# EAGLE board Interconnect_board_limit_switches_v1p6 (EAGLE 9.5.2)
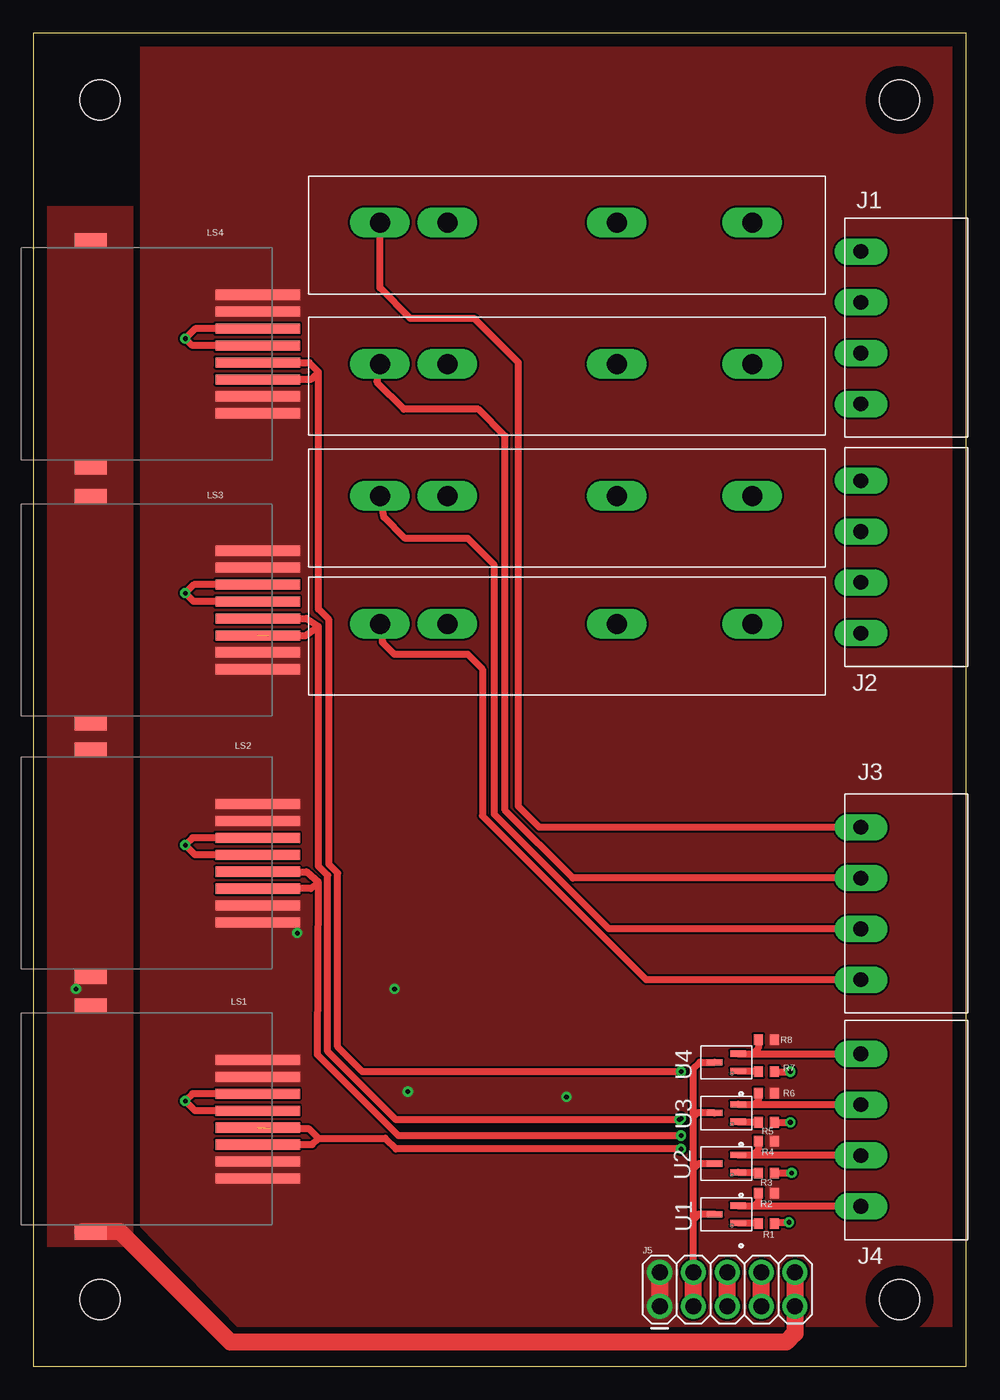
[diagram p0: board, top side]
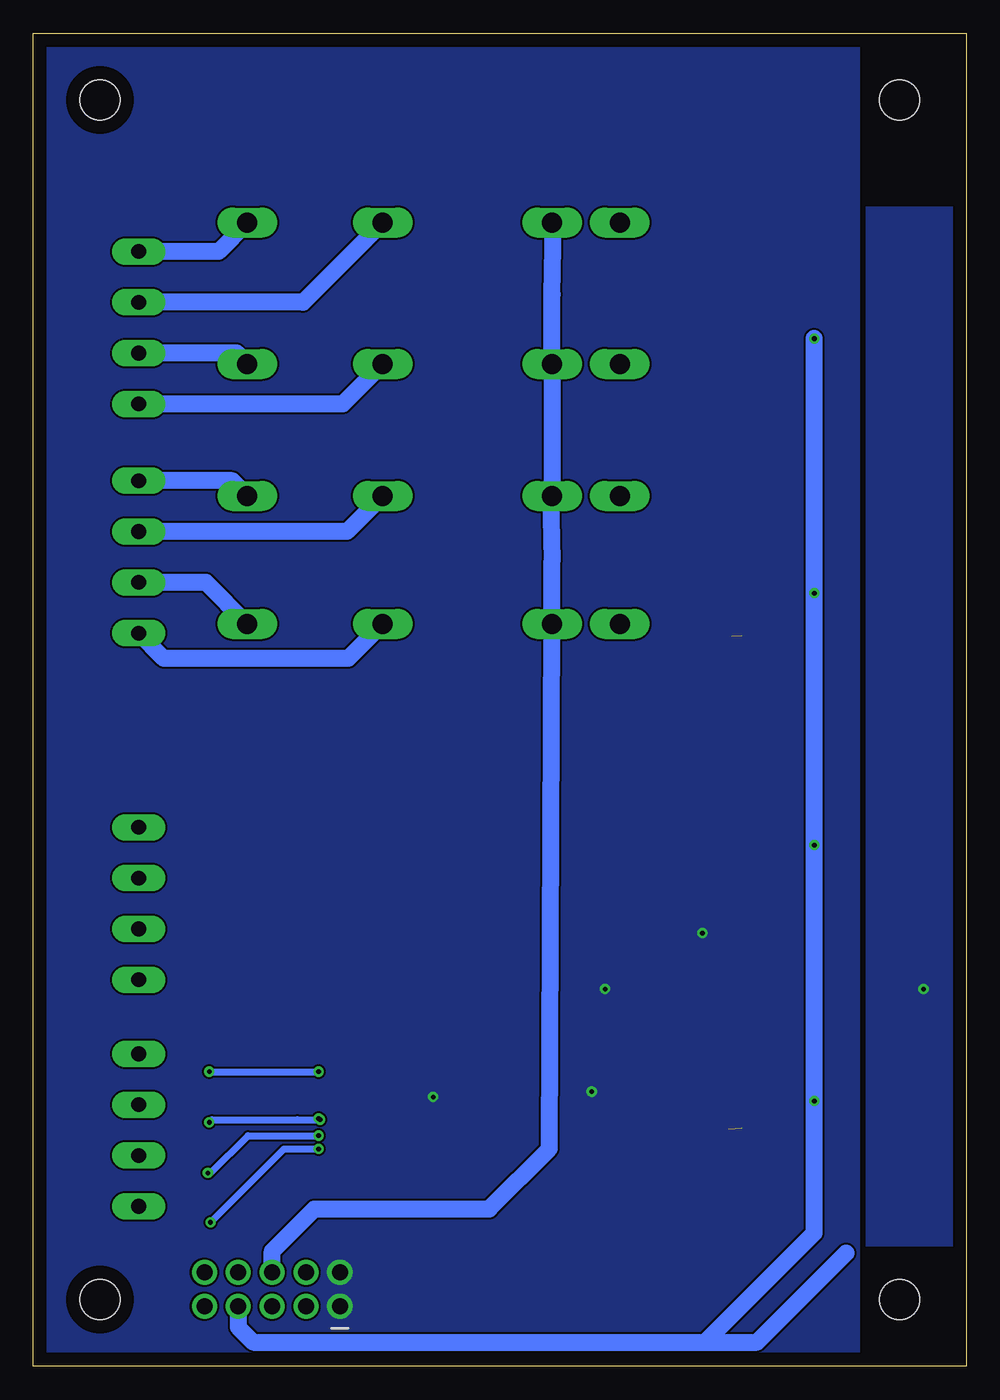
[diagram p1: board, bottom side, seen from below]

Size 70 x 100 mm. Coordinates in mm from the lower left corner, seen from the top.
Outline: 0,0 70,0 70,100 0,100 0,0
Copper layers (1*16): Top 0.035mm / dielectric 1.5mm / Bottom 0.035mm
Design rules "default": minimum track width 6mil, minimum drill 0.35mm, track to track 6mil, track to pad 6mil, pad to pad 6mil, via to via 6mil, smd to smd 6mil, copper to edge 40mil, drill to drill 6mil, minimum pad ring 10mil, minimum via ring 8mil, stop-mask expansion 4mil, vias tented up to drill 0mil, thermal gap 10mil
Holes 3 mm at 5,95 5,5 65,5 65,95

## Footprints (pad centres in the part's own frame; a part is rotated, then mirrored left to right if it is on the bottom)
1X4_3.81MM_PITCH = drill 1.1 pad 2 long: P$1 0,0; P$2 3.81,0; P$3 7.62,0; P$4 11.43,0
2X5 = drill 1.2 pad 1.88: 1 0,0; 2 0,2.54; 3 2.54,0; 4 2.54,2.54; 5 5.08,0; 6 5.08,2.54; 7 7.62,0; 8 7.62,2.54; 9 10.16,0; 10 10.16,2.54
RJ45_SMT = smd 0.76 x 6.35: P$1 -3.18,8.94; P$2 -1.91,8.94; P$3 -0.64,8.94; P$4 0.63,8.94; P$5 1.9,8.94; P$6 3.17,8.94; P$7 4.44,8.94; P$8 5.71,8.94 | smd 1.1 x 2.4: P$9 -7.25,-3.6; P$10 9.75,-3.6
0402 = smd 0.8 x 0.7: P$1 0,0.6; P$2 0,-0.6
RELAY_KYOTO_KF0604D = drill 1.5 long: P$1 0,0; P$2 -5.08,0; P$3 -17.78,0; P$4 -27.94,0
SOT323 = smd 0.457 x 1.168: 1 -0.65,-0.876; 2 0.65,-0.876; 3 0,0.876

## Placement (x,y rotation side)
J1  [1X4_3.81MM_PITCH]  62.1,72.2 90 top
J2  [1X4_3.81MM_PITCH]  62.1,55 90 top
J3  [1X4_3.81MM_PITCH]  62.1,29 90 top
J4  [1X4_3.81MM_PITCH]  62.1,12 90 top
J5  [2X5]  47,4.5 0 top
LS1  RJ45_SMTRJ  [RJ45_SMT]  7.9,19.8 270 top
LS2  RJ45_SMTRJ  [RJ45_SMT]  7.9,39 270 top
LS3  RJ45_SMTRJ  [RJ45_SMT]  7.9,58 270 top
LS4  RJ45_SMTRJ  [RJ45_SMT]  7.9,77.2 270 top
R1  200K  [0402]  55,10.7 270 top
R2  1K  [0402]  55,13 270 top
R3  200K  [0402]  55,14.5 270 top
R4  1K  [0402]  55,16.9 270 top
R5  200K  [0402]  55,18.3 270 top
R6  1k  [0402]  55,20.5 270 top
R7  200K  [0402]  55,22.1 270 top
R8  1k  [0402]  55,24.5 270 top
RELAY_1  RELAY_KYOTO_KF0604D  [RELAY_KYOTO_KF0604D]  26,55.7 180 top
RELAY_2  RELAY_KYOTO_KF0604D  [RELAY_KYOTO_KF0604D]  26,65.3 180 top
RELAY_4  RELAY_KYOTO_KF0604D  [RELAY_KYOTO_KF0604D]  26,85.8 180 top
RELAY_5  RELAY_KYOTO_KF0604D  [RELAY_KYOTO_KF0604D]  26,75.2 180 top
U1  [SOT323]  52,11.4 90 top
U2  [SOT323]  52,15.2 90 top
U3  [SOT323]  52,19 90 top
U4  [SOT323]  52,22.8 90 top

## Library data of the parts
J1-J4 LS1-LS4 R1-R8 RELAY_1 RELAY_2 RELAY_4 RELAY_5 = 3D_MIG_Controller
J5 = 3D_MIG_Controller; PROD_ID: CONN-08499; SF_ID: PRT-0778
U1-U4 = 3D_MIG_Controller; MANUFACTURER_PART_NUMBER: BC846BW; VENDOR: Nexperia

## Nets
1_LS: J4.P$1 R2.P$2 U1.2
2_LS: J4.P$2 R4.P$2 U2.2
3_LS: J4.P$3 R6.P$2 U3.2
4_LS: J4.P$4 R8.P$2 U4.2
GND: J5.1 J5.2 LS1.P$1 LS1.P$2 LS1.P$7 LS1.P$8 LS2.P$1 LS2.P$2 LS2.P$7 LS2.P$8 LS3.P$1 LS3.P$2 LS3.P$7 LS3.P$8 LS4.P$1 LS4.P$2 LS4.P$7 LS4.P$8 R2.P$1 R4.P$1 R6.P$1 R8.P$1
GNDE: J5.9 J5.10 LS1.P$9 LS1.P$10 LS2.P$9 LS2.P$10 LS3.P$9 LS3.P$10 LS4.P$9 LS4.P$10
N$1: R1.P$2 U1.1
N$2: R7.P$2 U4.1
N$5: R3.P$2 U2.1
N$11: R5.P$2 U3.1
R1: LS1.P$5 LS1.P$6 R1.P$1
R2: LS2.P$5 LS2.P$6 R3.P$1
R3: LS3.P$5 LS3.P$6 R5.P$1
R4: LS4.P$5 LS4.P$6 R7.P$1
RELAY_OUT_1: J3.P$1 RELAY_1.P$1
RELAY_OUT_2: J3.P$2 RELAY_2.P$1
RELAY_OUT_3: J3.P$3 RELAY_5.P$1
RELAY_OUT_4: J3.P$4 RELAY_4.P$1
RELAY_OUT_NEG_1: J2.P$2 RELAY_1.P$4
RELAY_OUT_NEG_2: J2.P$4 RELAY_2.P$4
RELAY_OUT_NEG_3: J1.P$2 RELAY_5.P$4
RELAY_OUT_NEG_4: J1.P$4 RELAY_4.P$4
RELAY_OUT_POS_1: J2.P$1 RELAY_1.P$3
RELAY_OUT_POS_2: J2.P$3 RELAY_2.P$3
RELAY_OUT_POS_3: J1.P$1 RELAY_5.P$3
RELAY_OUT_POS_4: J1.P$3 RELAY_4.P$3
VDD: J5.3 J5.4 U1.3 U2.3 U3.3 U4.3
VDD5: J5.5 J5.6 RELAY_1.P$2 RELAY_2.P$2 RELAY_4.P$2 RELAY_5.P$2
VDD12: J5.7 J5.8 LS1.P$3 LS1.P$4 LS2.P$3 LS2.P$4 LS3.P$3 LS3.P$4 LS4.P$3 LS4.P$4

## Tracks (layer width: path | path; a pad name or v marks a point on that pad's centre or on a via)
1_LS
  Top 0.508: U1.2 54.1,12.05 | 54.1,12.05 62.05,12.05 J4.P$1 | R2.P$2 54.4,12.35 54.1,12.05
2_LS
  Top 0.508: U2.2 54,15.85 | 54,15.85 62.06,15.85 J4.P$2 | R4.P$2 54.4,16.25 54,15.85
3_LS
  Top 0.508: U3.2 54.1,19.65 | 54.1,19.65 62.07,19.65 J4.P$3 | R6.P$2 54.4,19.95 54.1,19.65
4_LS
  Top 0.508: U4.2 54,23.45 | 54,23.45 62.08,23.45 J4.P$4 | R8.P$2 54.4,23.85 54,23.45
GND  (via drill 0.35)
  Top 1.27: J5.1 J5.2
  other vias: 19.8,32.5 27.1,28.3 28.1,20.6 40,20.2
  pour Top (no thermals): 8,100 8,10.5 15.3,3 47.6,3 70,3 70,100
  pour Bottom (no thermals): 8,100 70,100 70,-0.4 8,-0.4
GNDE  (via drill 0.35)
  Top 1.27: J5.10 J5.9 57.16,2.46 56.5,1.8 14.8,1.8 6.5,10.1 3.7,10.1
  other vias: 3.2,28.3
  pour Top (no thermals): 7.5,87 0,87 0,9 7.5,9
  pour Bottom (no thermals): 7.5,87 0,87 0,9 7.5,9
N$1
  Top 0.508: U1.1 54.35,10.75 R1.P$2
N$2
  Top 0.508: U4.1 54.35,22.15 R7.P$2
N$5
  Top 0.508: U2.1 54.35,14.55 R3.P$2
N$11
  Top 0.508: U3.1 54.35,18.35 R5.P$2
R1  (via drill 0.35)  (1 unrouted)
  Top 0.508: R1.P$1 55.7,10.8 v56.7,10.8 | 21.4,17.1 20.7,17.8 17.8,17.8 | LS1.P$6 20.93,16.63 21.4,17.1 | v48.6,16.3 27.2,16.3 26.4,17.1 21.4,17.1
  Bottom 0.508: v56.7,10.8 51.2,16.3 v48.6,16.3
R2  (via drill 0.35)
  Top 0.508: R3.P$1 v56.9,14.5 | v48.6,17.3 27.4,17.3 21.32,23.38 21.4,36.3 | 21.4,36.3 20.83,35.83 LS2.P$6 | LS2.P$5 20.5,37.1 21.4,36.3
  Bottom 0.508: v56.9,14.5 56.7,14.5 53.9,17.3 v48.6,17.3
R3  (via drill 0.35)  (1 unrouted)
  Top 0.508: R5.P$1 v56.8,18.3 | v48.48,18.5 27.2,18.5 22.09,23.61 22.09,36.83 21.4,37.51 21.4,55.5 | 21.4,55.5 20.4,54.8 17.6,54.8 | LS3.P$5 20.5,56.1 21.4,55.5
  Bottom 0.508: v56.8,18.3 56.6,18.5 50.2,18.5 v48.48,18.5 v48.6,18.59
R4  (via drill 0.35)
  Top 0.508: R7.P$1 v56.8,22.1 | v48.6,22.1 24.7,22.1 22.84,23.95 22.84,37 22.18,37.66 22.18,56.02 21.4,56.8 21.4,74.6 | 21.4,74.6 20.83,74.03 LS4.P$6 | LS4.P$5 20.7,75.3 21.4,74.6
  Bottom 0.508: v56.8,22.1 v48.6,22.1
RELAY_OUT_1
  Top 0.508: J3.P$1 46,29 33.7,41.3 33.7,52.3 32.6,53.4 27.1,53.4 26.2,54.3 RELAY_1.P$1
RELAY_OUT_2
  Top 0.508: J3.P$2 43.19,32.81 34.6,41.4 34.6,60.1 32.6,62.1 27.9,62.1 26.3,63.7 RELAY_2.P$1
RELAY_OUT_3
  Top 0.508: J3.P$3 40.48,36.62 35.4,41.7 35.4,69.8 33.4,71.8 27.8,71.8 25.8,73.8 RELAY_5.P$1
RELAY_OUT_4
  Top 0.508: J3.P$4 37.97,40.43 36.4,42 36.4,75.3 33.1,78.6 28.3,78.6 26,80.9 RELAY_4.P$1
RELAY_OUT_NEG_1
  Bottom 1.27: RELAY_1.P$4 57.05,58.81 J2.P$2
RELAY_OUT_NEG_2
  Bottom 1.27: RELAY_2.P$4 55.07,66.43 J2.P$4
RELAY_OUT_NEG_3
  Bottom 1.27: RELAY_5.P$4 54.75,76.01 J1.P$2
RELAY_OUT_NEG_4
  Bottom 1.27: RELAY_4.P$4 56.11,83.63 J1.P$4
RELAY_OUT_POS_1
  Bottom 1.27: RELAY_1.P$3 46.38,53.1 60.2,53.1 J2.P$1
RELAY_OUT_POS_2
  Bottom 1.27: RELAY_2.P$3 46.46,62.62 J2.P$3
RELAY_OUT_POS_3
  Bottom 1.27: RELAY_5.P$3 46.78,72.2 J1.P$1
RELAY_OUT_POS_4
  Bottom 1.27: RELAY_4.P$3 49.76,79.82 J1.P$3
VDD
  Top 0.508: J5.4 49.54,11 | 49.54,11 49.54,14.8 | 49.54,14.8 49.54,18.7 | 49.54,18.7 49.54,22.34 50,22.8 U4.3 | U3.3 49.84,19 49.54,18.7 | U2.3 49.94,15.2 49.54,14.8 | U1.3 49.94,11.4 49.54,11
  Top 1.27: J5.3 J5.4
VDD5
  Top 1.27: J5.5 J5.6
  Bottom 1.27: J5.6 52.08,8.62 48.9,11.8 35.8,11.8 31.28,16.32 RELAY_1.P$2 31.08,60.45 31.18,65.25 RELAY_2.P$2 RELAY_5.P$2 31.08,80.4 30.98,85.7 RELAY_4.P$2
VDD12  (via drill 0.35)
  Top 0.508: 16.58,58.5 LS3.P$3 12.04,58.64 v11.4,58 12.03,57.37 LS3.P$4 | LS4.P$3 12.14,77.84 v11.4,77.1 11.93,76.57 LS4.P$4 | LS2.P$3 11.94,39.64 v11.4,39.1 12.13,38.37 LS2.P$4 | LS1.P$3 11.94,20.44 v11.4,19.9 12.13,19.17 LS1.P$4
  Top 1.27: J5.7 J5.8
  Bottom 1.27: 19.6,1.8 53.5,1.8 54.62,2.92 J5.7 | 19.6,1.8 15.7,1.8 9,8.5 | v11.4,77.1 v11.4,58 v11.4,39.1 v11.4,19.9 11.4,10 19.6,1.8